# Altium PCB LCD.PcbDoc
Units mm, origin at the board's own origin, x right, y up, seen from the top; angles counter-clockwise.
Board outline 57.5 x 69 mm, 2 copper layers (F.Cu, B.Cu); 2 components, 33 nets, 66 pads, 9 vias.
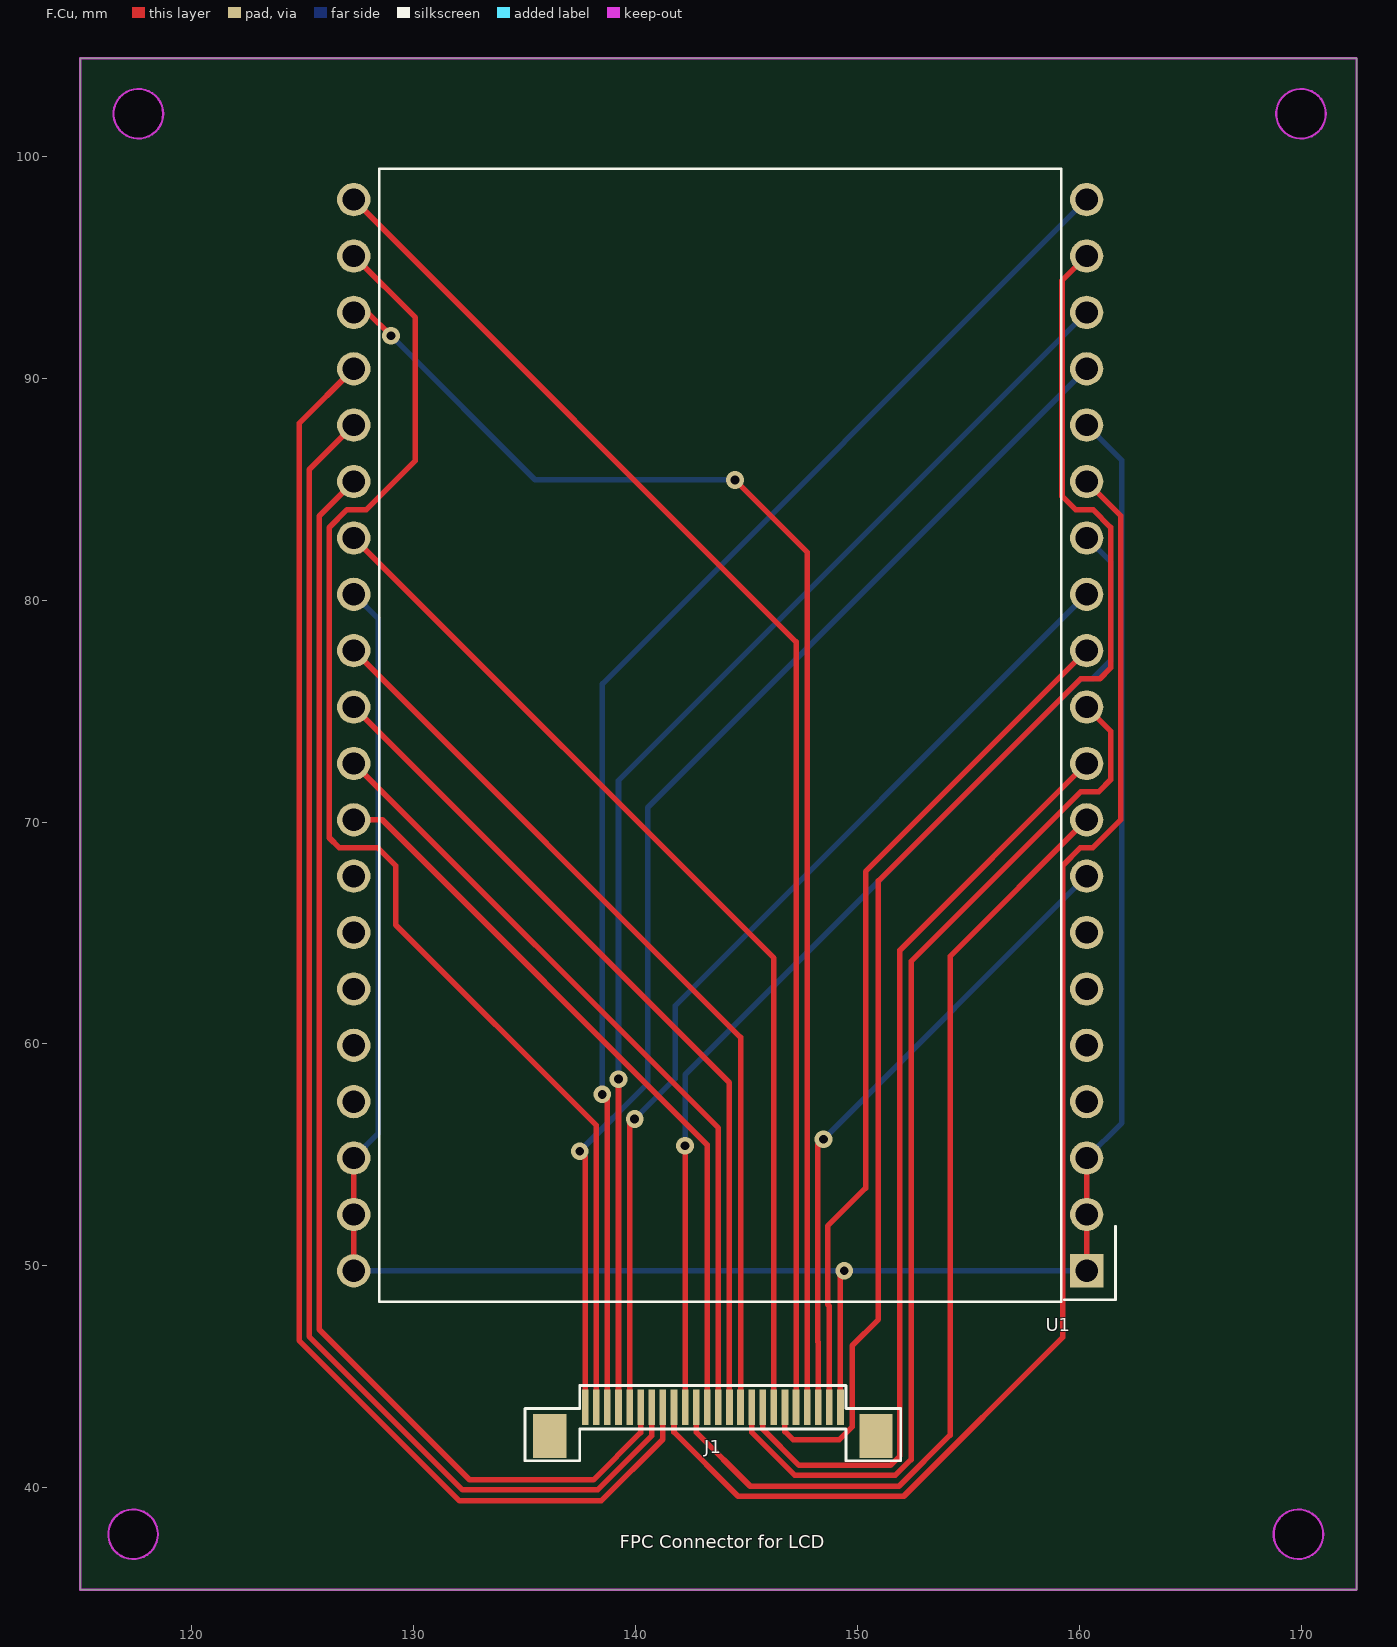
[diagram p0: F.Cu view]
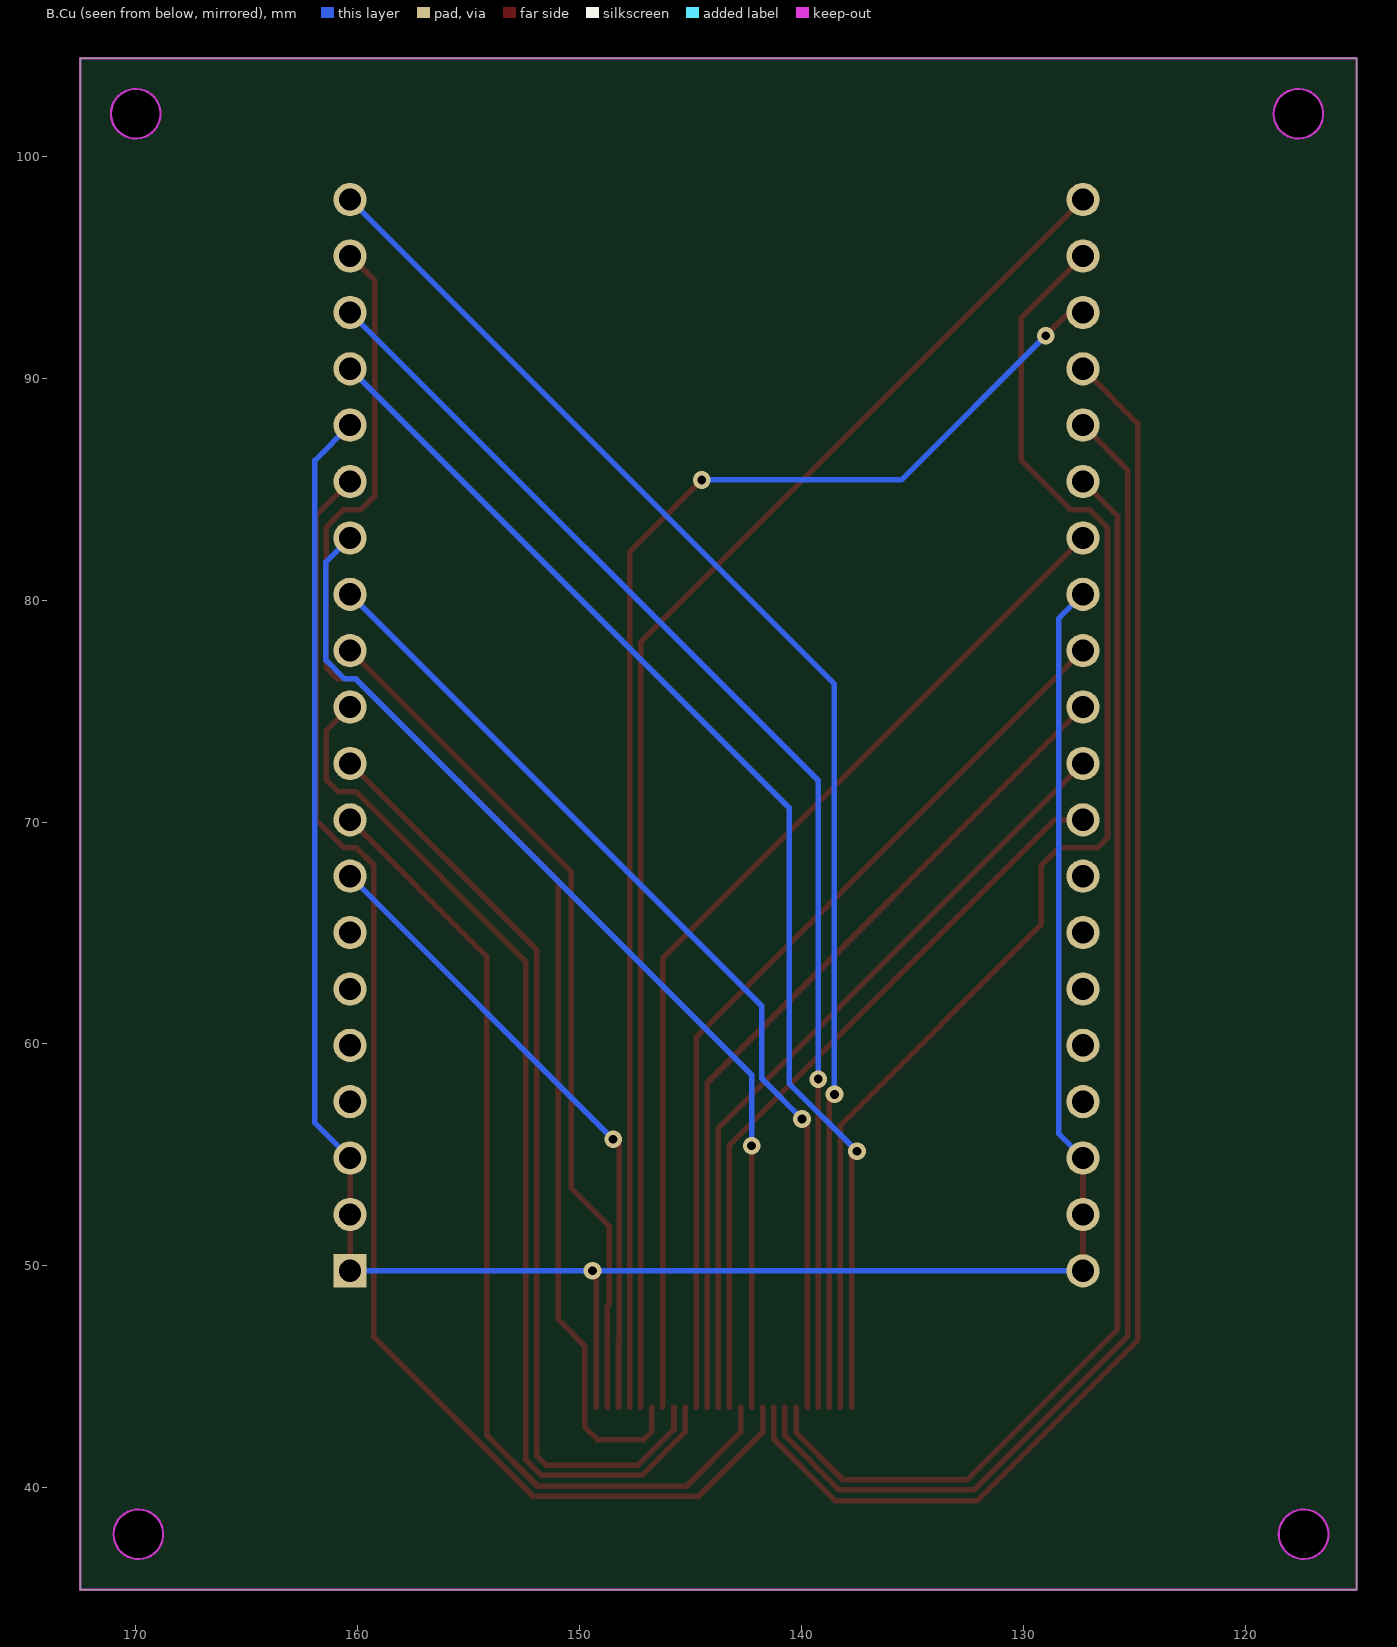
[diagram p1: B.Cu view, seen from below]

## Layer stack, top to bottom
F.Mask: solder mask 0.0102, Solder Resist, Dk 3.5
F.Cu: signal copper 0.0356
Dielectric 1: dielectric 0.32, FR-4, Dk 4.8
B.Cu: signal copper 0.0356
B.Mask: solder mask 0.0102, Solder Resist, Dk 3.5

## Board outline
115,104.41 115,35.41 172.5,35.41 172.5,104.41 115,104.41
cut-out: 118.51,37.91 118.471,38.202 118.359,38.474 118.179,38.707 117.946,38.887 117.674,38.999 117.382,39.038 117.09,38.999 116.818,38.887 116.585,38.707 116.405,38.474 116.293,38.202 116.254,37.91 116.293,37.618 116.405,37.346 116.585,37.113 116.818,36.933 117.09,36.821 117.382,36.782 117.674,36.821 117.946,36.933 118.179,37.113 118.359,37.346 118.471,37.618 118.51,37.91
cut-out: 171.128,101.91 171.089,102.202 170.977,102.474 170.797,102.707 170.564,102.887 170.292,102.999 170,103.038 169.708,102.999 169.436,102.887 169.203,102.707 169.023,102.474 168.911,102.202 168.872,101.91 168.911,101.618 169.023,101.346 169.203,101.113 169.436,100.933 169.708,100.821 170,100.782 170.292,100.821 170.564,100.933 170.797,101.113 170.977,101.346 171.089,101.618 171.128,101.91
cut-out: 118.746,101.91 118.707,102.202 118.595,102.474 118.415,102.707 118.182,102.887 117.91,102.999 117.618,103.038 117.326,102.999 117.054,102.887 116.821,102.707 116.641,102.474 116.529,102.202 116.49,101.91 116.529,101.618 116.641,101.346 116.821,101.113 117.054,100.933 117.326,100.821 117.618,100.782 117.91,100.821 118.182,100.933 118.415,101.113 118.595,101.346 118.707,101.618 118.746,101.91
cut-out: 171.01,37.91 170.971,38.202 170.859,38.474 170.679,38.707 170.446,38.887 170.174,38.999 169.882,39.038 169.59,38.999 169.318,38.887 169.085,38.707 168.905,38.474 168.793,38.202 168.754,37.91 168.793,37.618 168.905,37.346 169.085,37.113 169.318,36.933 169.59,36.821 169.882,36.782 170.174,36.821 170.446,36.933 170.679,37.113 170.859,37.346 170.971,37.618 171.01,37.91

## Design rules (kind name [scope] priority, off if disabled: settings)
Clearance [All] p1: gap=0.254 ignorepadtopadclearanceinfootprint=FALSE except(0: Arc-Hole Track-Hole SMDPad-Hole THPad-Hole Via-Hole Fill-Hole Poly-Hole Region-Hole Text-Hole)
MinimumSolderMaskSliver [All] p1: minsoldermaskwidth=0
PolygonConnect [All] p1: connectstyle=Direct reliefconductorwidth=0.254 reliefentries=4 polygonreliefangle="90 Angle" airgapwidth=0.254
RoutingVias [All] p1: holewidth=0.711 width=1.27 viastyle="Through Hole" minholewidth=0.711 minwidth=1.27 maxholewidth=0.711 maxwidth=1.27
SilkToSilkClearance [All] p1: silktosilkclearance=0
SilkToSolderMaskClearance [IsPad] p1: minsilkscreentomaskgap=0 clearancetoexposedcopper=TRUE
SolderMaskExpansion [All] p1: expansion=0.102 istentingtop=FALSE
Width [All] p1: maxlimit=10 minlimit=0.254 preferedwidth=0.254 minimp=50.000000 maximp=50.000000 favimp=50.000000
27 further rules are at their usual default settings.

## Components (designator, comment, footprint, x,y, rotation, side; value= is the part's Value field where it differs from the comment)
J1 "FPC Connector" FPC_24 143.5,43.635 r0 top
U1 "DE113-XX-XX" DE113-XX-XX 160.343,49.78 r180 top

## Footprints (in the part's own frame and the unit in brackets; to place one, negate y for a bottom-side part, rotate by r counter-clockwise, add the part's x,y. Pads: shape width x height; smd on the part's side, far side on the other; paste and mask are expansions set on the pad)
DE113-XX-XX [mm]
  rect 1.5x1.524 hole 1 paste-2539.97 mask+0: 1(0,0)
  round 1.5 hole 1 paste-2539.97 mask+0: 2(0,-2.54) 3(0,-5.08) 4(0,-7.62) 5(0,-10.16) 6(0,-12.7) 7(0,-15.24) 8(0,-17.78) 9(0,-20.32) 10(0,-22.86) 11(0,-25.4) 12(0,-27.94) 13(0,-30.48) 14(0,-33.02) 15(0,-35.56) 16(0,-38.1) 17(0,-40.64) 18(0,-43.18) 19(0,-45.72) 20(0,-48.26) 21(33.02,-48.26) 22(33.02,-45.72) 23(33.02,-43.18) 24(33.02,-40.64) 25(33.02,-38.1) 26(33.02,-35.56) 27(33.02,-33.02) 28(33.02,-30.48) 29(33.02,-27.94) 30(33.02,-25.4) 31(33.02,-22.86) 32(33.02,-20.32) 33(33.02,-17.78) 34(33.02,-15.24) 35(33.02,-12.7) 36(33.02,-10.16) 37(33.02,-7.62) 38(33.02,-5.08) 39(33.02,-2.54) 40(33.02,0)
  silkscreen extent -1.3,-49.65 31.87,1.39
FPC_24 [mm]
  rect 1.5x2 smd mask+0: 0(-7.35,-1.3) 0(7.35,-1.3)
  rect 0.3x1.6 smd mask+0: 1(-5.75,0) 2(-5.25,0) 3(-4.75,0) 4(-4.25,0) 5(-3.75,0) 6(-3.25,0) 7(-2.75,0) 8(-2.25,0) 9(-1.75,0) 10(-1.25,0) 11(-0.75,0) 12(-0.25,0) 13(0.25,0) 14(0.75,0) 15(1.25,0) 16(1.75,0) 17(2.25,0) 18(2.75,0) 19(3.25,0) 20(3.75,0) 21(4.25,0) 22(4.75,0) 23(5.25,0) 24(5.75,0)
  silkscreen extent -8.46,-2.42 8.46,0.98

## Part data
J1: library part FPC_24, Sheetfile=LCD.kicad_sch
U1: "http://www.display-elektronik.de/filter/DE113-RS-20_635.pdf", Sheetfile=LCD.kicad_sch

## Via types
v1: diameter 0.8, hole 0.4, F.Cu to B.Cu, tented both sides, 9 vias

## Nets (pads, with @x,y where several pads share a name; then routed paths per layer and width w, separated by ;. In a path a pad name is that pad's centre, name@x,y a point inside that pad or via, vN(x,y) a via of type N, cw(c..) or ccw(c..) an arc to the next point about the centre after c; other vN are vias at no path point)
20V_RANGE: J1.23 U1.12 | length 39
  F.Cu w0.25: J1.23 148.75,48.188 148.67,48.268 148.67,51.792 150.384,53.506 150.384,67.762 U1.12
200V_RANGE: J1.22 U1.8 | length 29
  F.Cu w0.25: J1.22 148.25,46.553 148.22,46.583 148.22,55.438 v1(148.49,55.707)
  B.Cu w0.25: v1(148.49,55.707) U1.8
GND: J1.24 U1.1 U1.2 U1.3 U1.16 U1.28 U1.38 U1.39 U1.40 | length 110
  F.Cu w0.25: U1.40 U1.39 U1.38 ; J1.24 149.25,49.607 v1(149.423,49.78) ; U1.1 U1.2 U1.3
  B.Cu w0.25: U1.40 v1(149.423,49.78) U1.1 ; U1.38 128.421,55.959 128.421,79.161 U1.28 ; U1.3 161.931,56.448 161.931,86.292 U1.16
ICL7107_A1: J1.14 U1.30 | length 38.6
  F.Cu w0.25: U1.30 144.25,58.252 J1.14
ICL7107_A2: J1.7 U1.25 | length 62.5
  F.Cu w0.25: 125.314,66.01 125.314,46.826 132.23,39.91 138.309,39.91 140.75,42.351 J1.7 ; 125.314,66.01 125.314,85.872 U1.25
ICL7107_A3: J1.20 U1.21 | length 62.7
  F.Cu w0.25: U1.21 147.25,78.113 J1.20
ICL7107_B1: J1.15 U1.29 | length 41.3
  F.Cu w0.25: U1.29 144.75,60.293 J1.15
ICL7107_B2: J1.8 U1.24 | length 66.8
  F.Cu w0.25: U1.24 124.864,87.962 124.864,46.64 132.094,39.41 138.468,39.41 141.25,42.192 J1.8
ICL7107_B3: J1.3 U1.20 | length 63.5
  F.Cu w0.25: v1(138.52,57.729) 138.75,57.499 J1.3
  B.Cu w0.25: v1(138.52,57.729) 138.52,76.217 U1.20
ICL7107_C1: J1.16 U1.11 | length 48
  F.Cu w0.25: J1.16 145.25,42.51 147.2,40.56 151.717,40.56 152.432,41.275 152.432,63.721 160.081,71.37 160.89,71.37 161.425,71.905 161.425,74.098 U1.11
ICL7107_C2: J1.9 U1.15 | length 63.4
  F.Cu w0.25: J1.9 141.75,42.51 144.638,39.622 152.101,39.622 159.267,46.788 159.267,68.051 160.046,68.83 160.609,68.83 161.875,70.096 161.875,83.808 U1.15
ICL7107_C3: J1.19 U1.19 | length 64.4
  F.Cu w0.25: J1.19 146.75,42.535 147.115,42.17 149.199,42.17 149.775,42.746 149.775,46.404 150.962,47.591 150.962,67.346 160.067,76.45 160.931,76.45 161.425,76.944 161.425,83.278 160.632,84.07 159.847,84.07 159.232,84.685 159.232,94.389 U1.19
ICL7107_D1: J1.17 U1.10 | length 42.7
  F.Cu w0.25: J1.17 145.75,42.647 147.387,41.01 151.497,41.01 151.925,41.438 151.925,64.223 U1.10
ICL7107_D2: J1.10 U1.14 | length 47.9
  F.Cu w0.25: J1.10 142.25,44.76 v1(142.25,55.414)
  B.Cu w0.25: v1(142.25,55.414) 142.25,58.614 160.086,76.45 160.594,76.45 161.438,77.293 161.438,81.705 U1.14
ICL7107_D3: J1.4 U1.18 | length 58.1
  F.Cu w0.25: J1.4 v1(139.25,58.414)
  B.Cu w0.25: v1(139.25,58.414) 139.25,71.868 U1.18
ICL7107_E1: J1.11 U1.9 | length 44.8
  F.Cu w0.25: J1.11 142.75,42.51 145.188,40.072 151.886,40.072 154.189,42.375 154.189,63.946 U1.9
ICL7107_E2: J1.5 U1.13 | length 45.2
  F.Cu w0.25: J1.5 139.75,56.388 v1(139.978,56.616)
  B.Cu w0.25: v1(139.978,56.616) 141.797,58.435 141.797,61.715 U1.13
ICL7107_E3: J1.1 U1.17 | length 56.3
  F.Cu w0.25: v1(137.504,55.167) 137.75,54.921 137.75,44.76 J1.1
  B.Cu w0.25: v1(137.504,55.167) 140.564,58.227 140.564,70.641 U1.17
ICL7107_F1: J1.13 U1.31 | length 35.8
  F.Cu w0.25: U1.31 143.75,56.213 J1.13
ICL7107_F2: J1.6 U1.26 | length 58.2
  F.Cu w0.25: U1.26 125.768,83.785 125.768,47.142 132.55,40.36 138.123,40.36 140.25,42.487 J1.6
ICL7107_F3: J1.2 U1.22 | length 61.1
  F.Cu w0.25: U1.22 130.101,92.722 130.101,86.281 127.89,84.07 127.023,84.07 126.218,83.265 126.218,69.289 126.677,68.83 128.415,68.83 129.21,68.035 129.21,65.369 138.25,56.329 J1.2
ICL7107_G1: J1.12 U1.32 | length 33.8
  F.Cu w0.25: U1.32 128.605,70.1 143.25,55.455 J1.12
ICL7107_G2: J1.18 U1.27 | length 47
  F.Cu w0.25: U1.27 146.25,63.873 J1.18
ICL7107_G3: J1.21 U1.23 | length 63.4
  F.Cu w0.25: U1.23 127.95,92.96 v1(129,91.91) ; v1(144.5,85.41) 147.75,82.16 J1.21
  B.Cu w0.25: v1(129,91.91) 135.5,85.41 v1(144.5,85.41)
unconnected-(U1-Pad4): U1.4
unconnected-(U1-Pad5): U1.5
unconnected-(U1-Pad6): U1.6
unconnected-(U1-Pad7): U1.7
unconnected-(U1-Pad33): U1.33
unconnected-(U1-Pad34): U1.34
unconnected-(U1-Pad35): U1.35
unconnected-(U1-Pad36): U1.36
unconnected-(U1-Pad37): U1.37
pads on no net: J1.0

## Keep-outs
Edge.Cuts:
  circle w0.1: c170,101.91 r1.118
  circle w0.1: c117.618,101.91 r1.118
  circle w0.1: c169.882,37.91 r1.118
  circle w0.1: c117.382,37.91 r1.118
  circle w0.1: c117.382,37.91 r1.118
  lines w0.1: 115,35.41 172.5,35.41 ; 115,35.41 115,104.41 ; 115,35.41 172.5,35.41 ; 115,35.41 115,104.41 ; 115,104.41 172.5,104.41 ; 115,104.41 172.5,104.41 ; 172.5,35.41 172.5,104.41 ; 172.5,35.41 172.5,104.41

## Silkscreen, mask and mechanical layers (free items; w line width, h text height)
F.SilkS:
  text "FPC Connector for LCD" at 139.314,37.079 h1

## Dimensions
115,104.41 to 115,35.41 on B.SilkS
115,104.41 to 172.5,104.41 on B.SilkS